# Altium PCB PCB1.PcbDoc
Units mil, origin at the board's own origin, x right, y up, seen from the top; angles counter-clockwise.
Board outline 2366.3 x 3345.45 mil, 2 copper layers (Top Layer, Bottom Layer); 28 components, 46 nets, 216 pads, 46 vias.
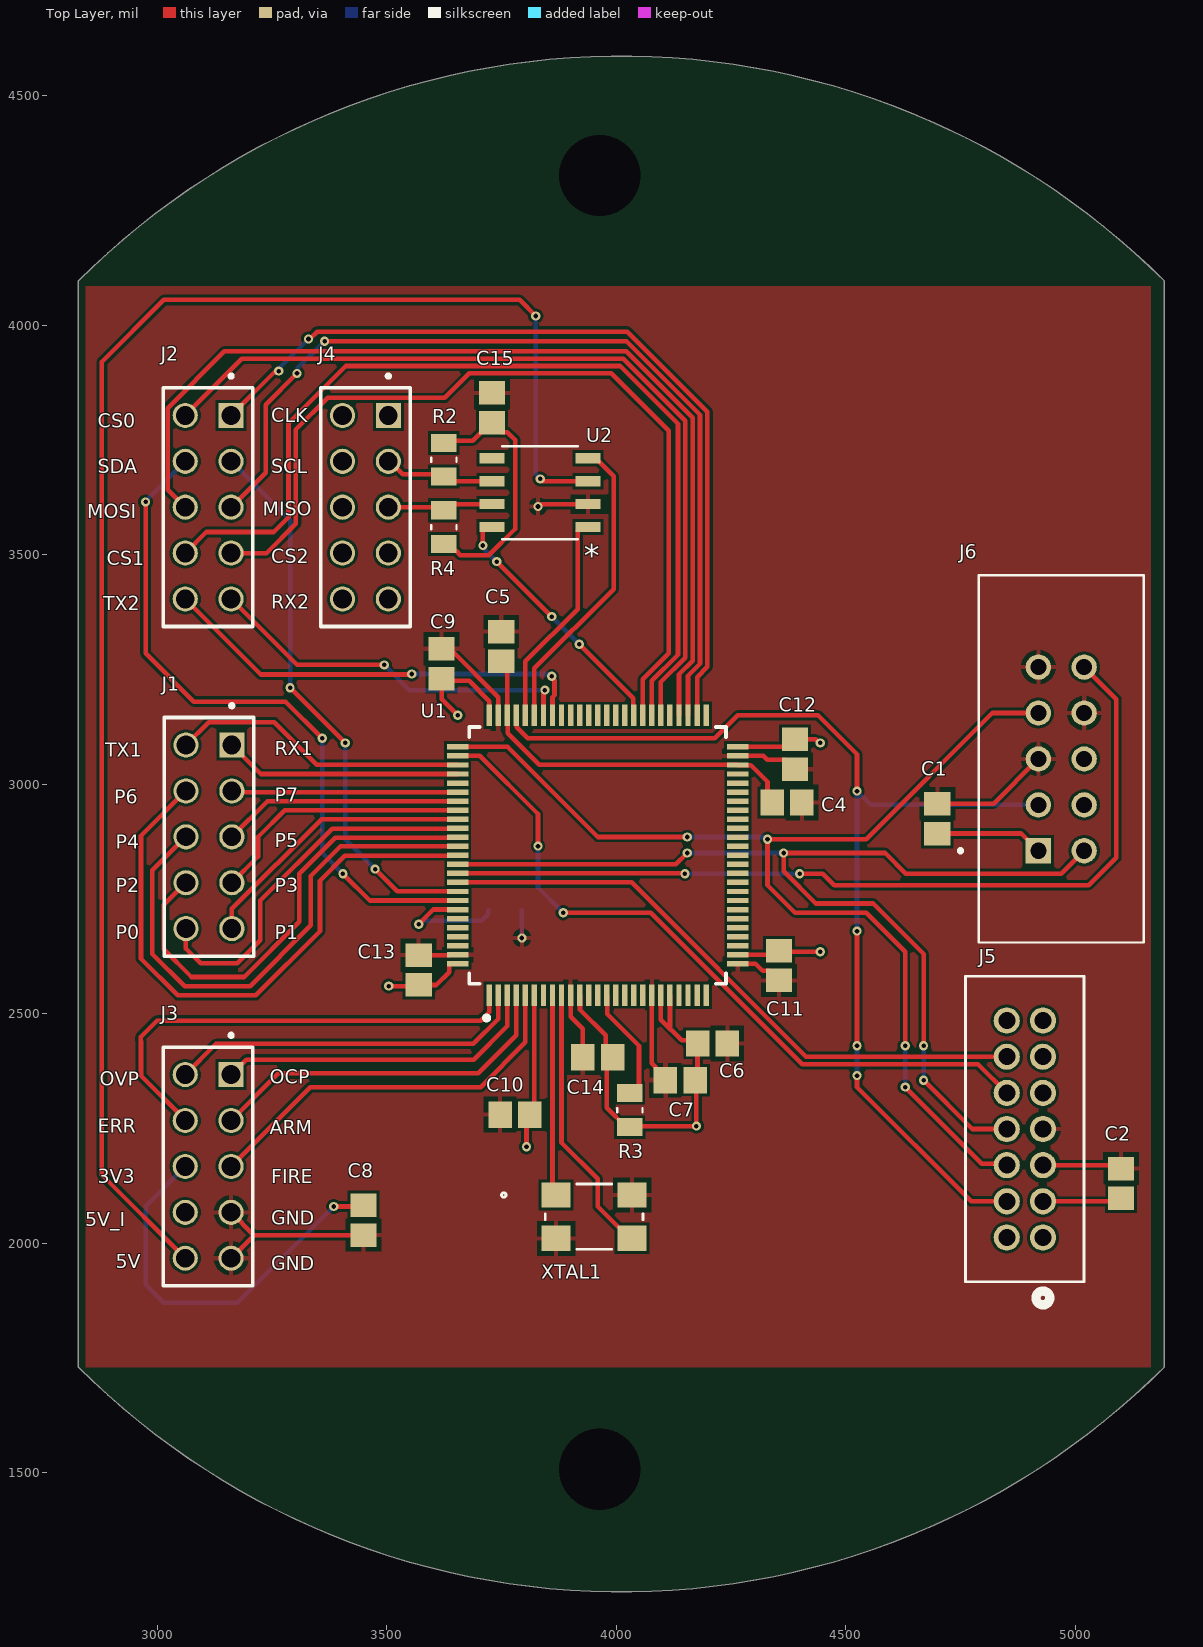
[diagram p0: Top Layer view]
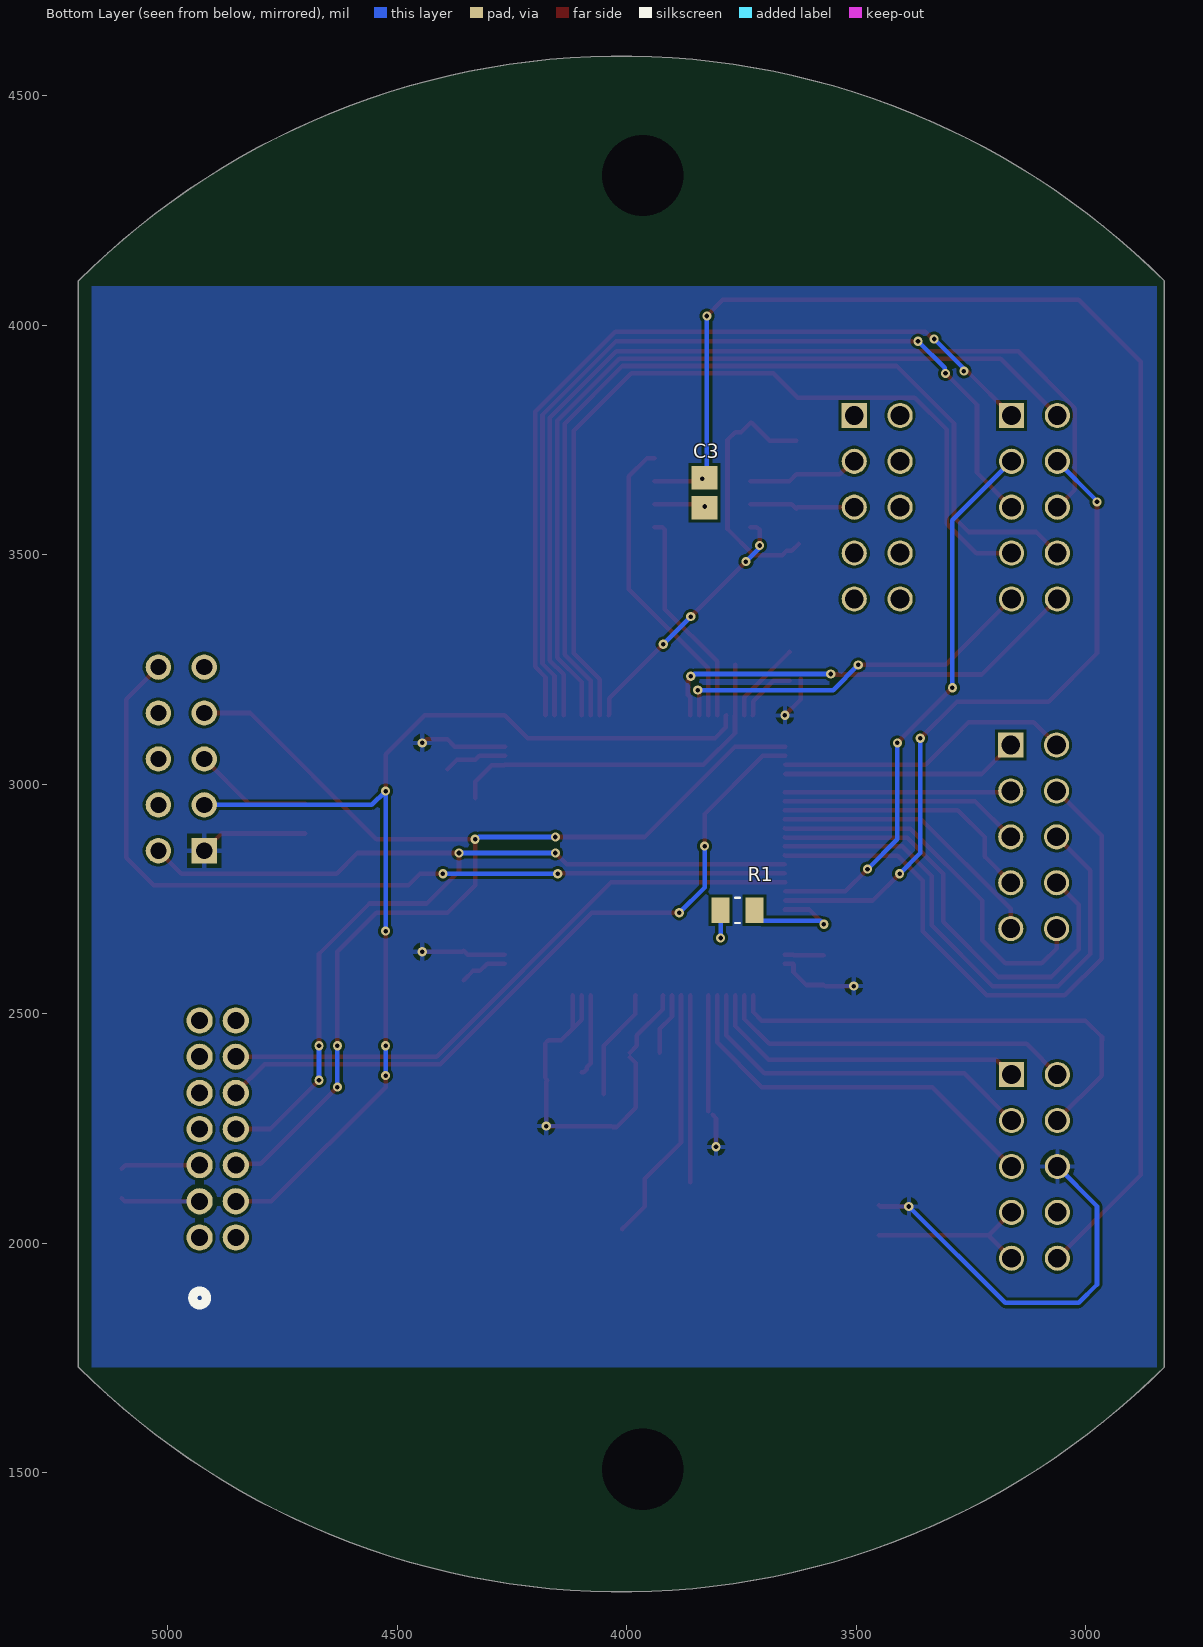
[diagram p1: Bottom Layer view, seen from below]

## Layer stack, top to bottom
Top Solder: solder mask 0.4, Solder Resist, Dk 3.5
Top Layer: signal copper 1.4
Dielectric 1: dielectric 12.6, FR-4, Dk 4.8
Bottom Layer: signal copper 1.4
Bottom Solder: solder mask 0.4, Solder Resist, Dk 3.5

## Board outline
2828.29,1730.47 ccw(c4011.44,2913.62) 5194.59,1730.47 5194.59,4096.06 ccw(c4011.44,2912.91) 2828.29,4096.06

## Design rules (kind name [scope] priority, off if disabled: settings)
Clearance [All] p1: gap=6 ignorepadtopadclearanceinfootprint=FALSE
HoleSize [All] p1: absolutevalues=TRUE maxlimit=200 minlimit=1 maxpercent=80.000 minpercent=20.000
MinimumSolderMaskSliver [All] p1: minsoldermaskwidth=5
PolygonConnect [All] p1: connectstyle=Relief reliefconductorwidth=10 reliefentries=4 polygonreliefangle="90 Angle" airgapwidth=10
RoutingVias [All] p1: holewidth=10 width=20 viastyle="Through Hole" minholewidth=10 minwidth=20 maxholewidth=200 maxwidth=200
SilkToSolderMaskClearance [IsPad] p1: minsilkscreentomaskgap=9 clearancetoexposedcopper=TRUE
SolderMaskExpansion [All] p1: expansion=4 istentingtop=FALSE
SupplyNets "Schematic Supply Nets_43" [InNet('GPIO4')] p1: voltage=0.000
SupplyNets "Schematic Supply Nets_42" [InNet('GPIO3')] p2: voltage=0.000
SupplyNets "Schematic Supply Nets_41" [InNet('GPIO6')] p3: voltage=0.000
SupplyNets "Schematic Supply Nets_40" [InNet('GPIO7')] p4: voltage=0.000
SupplyNets "Schematic Supply Nets_39" [InNet('GPIO5')] p5: voltage=0.000
SupplyNets "Schematic Supply Nets_38" [InNet('GPIO2')] p6: voltage=0.000
SupplyNets "Schematic Supply Nets_37" [InNet('GPIO0')] p7: voltage=0.000
SupplyNets "Schematic Supply Nets_36" [InNet('CS1')] p8: voltage=0.000
SupplyNets "Schematic Supply Nets_35" [InNet('CS2')] p9: voltage=0.000
SupplyNets "Schematic Supply Nets_34" [InNet('T_SEL')] p10: voltage=0.000
SupplyNets "Schematic Supply Nets_33" [InNet('GPIO1')] p11: voltage=0.000
SupplyNets "Schematic Supply Nets_32" [InNet('FIRE')] p12: voltage=0.000
SupplyNets "Schematic Supply Nets_31" [InNet('FDCAN1_RX')] p13: voltage=0.000
SupplyNets "Schematic Supply Nets_30" [InNet('RESET')] p14: voltage=0.000
SupplyNets "Schematic Supply Nets_29" [InNet('SWO')] p15: voltage=0.000
SupplyNets "Schematic Supply Nets_28" [InNet('SPI_MOSI')] p16: voltage=0.000
SupplyNets "Schematic Supply Nets_27" [InNet('3V3')] p17: voltage=0.000
SupplyNets "Schematic Supply Nets_26" [InNet('JTDI')] p18: voltage=0.000
SupplyNets "Schematic Supply Nets_25" [InNet('CANH')] p19: voltage=0.000
SupplyNets "Schematic Supply Nets_24" [InNet('SWDRESET')] p20: voltage=0.000
SupplyNets "Schematic Supply Nets_23" [InNet('OVP')] p21: voltage=0.000
SupplyNets "Schematic Supply Nets_22" [InNet('OCP')] p22: voltage=0.000
SupplyNets "Schematic Supply Nets_21" [InNet('OSC_IN')] p23: voltage=0.000
SupplyNets "Schematic Supply Nets_20" [InNet('ERR')] p24: voltage=0.000
SupplyNets "Schematic Supply Nets_19" [InNet('USART2_RX')] p25: voltage=0.000
SupplyNets "Schematic Supply Nets_18" [InNet('SPI_CLK')] p26: voltage=0.000
SupplyNets "Schematic Supply Nets_17" [InNet('USART1_RX')] p27: voltage=0.000
SupplyNets "Schematic Supply Nets_16" [InNet('CS0')] p28: voltage=0.000
SupplyNets "Schematic Supply Nets_15" [InNet('BOOT0')] p29: voltage=0.000
SupplyNets "Schematic Supply Nets_14" [InNet('ARM')] p30: voltage=0.000
SupplyNets "Schematic Supply Nets_13" [InNet('SPI_MISO')] p31: voltage=0.000
SupplyNets "Schematic Supply Nets_12" [InNet('GND')] p32: voltage=0.000
SupplyNets "Schematic Supply Nets_11" [InNet('USART2_TX')] p33: voltage=0.000
SupplyNets "Schematic Supply Nets_10" [InNet('FDCAN1_TX')] p34: voltage=0.000
SupplyNets "Schematic Supply Nets_9" [InNet('I2C_SCL')] p35: voltage=0.000
SupplyNets "Schematic Supply Nets_8" [InNet('SWDCLK')] p36: voltage=0.000
SupplyNets "Schematic Supply Nets_7" [InNet('5V_ISO')] p37: voltage=0.000
SupplyNets "Schematic Supply Nets_6" [InNet('USART1_TX')] p38: voltage=0.000
SupplyNets "Schematic Supply Nets_5" [InNet('I2C_SDA')] p39: voltage=0.000
SupplyNets "Schematic Supply Nets_4" [InNet('OSC_OUT')] p40: voltage=0.000
SupplyNets "Schematic Supply Nets_3" [InNet('SWDIO')] p41: voltage=0.000
SupplyNets "Schematic Supply Nets_2" [InNet('5V')] p42: voltage=0.000
SupplyNets "Schematic Supply Nets_1" [InNet('CANL')] p43: voltage=0.000
SupplyNets "Schematic Supply Nets" [InNet('JTRST')] p44: voltage=0.000
Width [All] p1: maxlimit=10 minlimit=7.87 preferedwidth=10
27 further rules are at their usual default settings.

## Components (designator, comment, footprint, x,y, rotation, side; value= is the part's Value field where it differs from the comment)
C1 "100n" CAPC2013X145X48NL20T23 4700,2925 r270 top
C2 "100n" CAPC2013X145X48NL20T23 5100,2130 r270 top
C3 "100n" CAPC2013X145X48NL20T23 3830,3635 r90 bottom
C4 "2.2u" CAPC2013X145X48NL20T23 4372.48,2960 r180 top
C5 "2.2u" CAPC2013X145X48NL20T23 3750,3300 r270 top
C6 "100n" CAPC2013X145X48NL20T23 4210,2435 r0 top
C7 "100n" CAPC2013X145X48NL20T23 4140,2355 r180 top
C8 "4.7u" CAPC2013X145X48NL20T23 3450,2050 r90 top
C9 "100n" CAPC2013X145X48NL20T23 3620,3262.52 r270 top
C10 "100n" CAPC2013X145X48NL20T23 3780,2280 r0 top
C11 "100n" CAPC2013X145X48NL20T23 4355,2605 r90 top
C12 "100n" CAPC2013X145X48NL20T23 4390,3065 r90 top
C13 "100n" CAPC2013X145X48NL20T23 3570,2595 r270 top
C14 "100n" CAPC2013X145X48NL20T23 3960,2405 r0 top
C15 "4.7n" CAPC2013X145X48NL20T23 3730,3820 r270 top
J1 "SSW-105-02-G-D" SAMTEC_SSW-105-02-G-D 3162.99,3085.35 r90 top locked
J2 "SSW-105-02-G-D" SAMTEC_SSW-105-02-G-D 3161.42,3803.46 r90 top locked
J3 "SSW-105-02-G-D" SAMTEC_SSW-105-02-G-D 3161.42,2367.24 r90 top locked
J4 "CAN" SAMTEC_SSW-105-02-G-D 3503.94,3803.46 r90 top locked
J5 "878311431" CONN14_878311431_MOL 4930,2012.52 r90 top
J6 "103308-1" TE_103308-1 4970,3055 r90 top
R1 "" RESC2012X65N 3758.19,2725 r0 bottom
R2 "" RESC2012X65N 3625,3706.81 r270 top
R3 "" RESC2012X65N 4030,2290 r270 top
R4 "" RESC2012X65N 3625,3560 r270 top
U1 "STM32H7B0VBT6" FP-LQFP100-MFG 3960,2845 r90 top locked
U2 "MCP2557FD-H/SN" SOIC8_SN_MCH 3834.5,3635 r180 top
XTAL1 "FY0800018" "4xtal- 1-3xtal 2-4NC_DIO" 3952.32,2057.76 r0 top

## Footprints (in the part's own frame and the unit in brackets; to place one, negate y for a bottom-side part, rotate by r counter-clockwise, add the part's x,y. Pads: shape width x height; smd on the part's side, far side on the other; paste and mask are expansions set on the pad)
"4xtal- 1-3xtal 2-4NC_DIO" [mil]
  rect 63x55 smd paste-27.5 mask+0: 1(-82.68,47.24) 2(82.68,47.24) 3(82.68,-47.24) 4(-82.68,-47.24)
  silkscreen extent -202,-71 106,71, body extent -101,-66 101,66, height 31
CAPC2013X145X48NL20T23 [mm] "Chip Capacitor, 2-Leads, Body 2.00x1.25mm, IPC Medium Density"
  rect 1.3x1.45 smd: 1(-0.825,0) 2(0.825,0)
  body extent -1.1,-0.72 1.1,0.72, height 1.45
CONN14_878311431_MOL [mil]
  round 57 hole 37 paste-99999 mask+0: 1(0,0) 2(0,78.74) 3(78.74,0) 4(78.74,78.74) 5(157.48,0) 6(157.48,78.74) 7(236.22,0) 8(236.22,78.74) 9(314.96,0) 10(314.96,78.74) 11(393.7,0) 12(393.7,78.74) 13(472.44,0) 14(472.44,78.74)
  silkscreen extent -147,-90 569,168
FP-LQFP100-MFG [mm]
  rect 1.2x0.3 smd paste+0 mask+0: 1(-7.75,6) 2(-7.75,5.5) 3(-7.75,5) 4(-7.75,4.5) 5(-7.75,4) 6(-7.75,3.5) 7(-7.75,3) 8(-7.75,2.5) 9(-7.75,2) 10(-7.75,1.5) 11(-7.75,1) 12(-7.75,0.5) 13(-7.75,0) 14(-7.75,-0.5) 15(-7.75,-1) 16(-7.75,-1.5) 17(-7.75,-2) 18(-7.75,-2.5) 19(-7.75,-3) 20(-7.75,-3.5) 21(-7.75,-4) 22(-7.75,-4.5) 23(-7.75,-5) 24(-7.75,-5.5) 25(-7.75,-6) 51(7.75,-6) 52(7.75,-5.5) 53(7.75,-5) 54(7.75,-4.5) 55(7.75,-4) 56(7.75,-3.5) 57(7.75,-3) 58(7.75,-2.5) 59(7.75,-2) 60(7.75,-1.5) 61(7.75,-1) 62(7.75,-0.5) 63(7.75,0) 64(7.75,0.5) 65(7.75,1) 66(7.75,1.5) 67(7.75,2) 68(7.75,2.5) 69(7.75,3) 70(7.75,3.5) 71(7.75,4) 72(7.75,4.5) 73(7.75,5) 74(7.75,5.5) 75(7.75,6)
  rect 0.3x1.2 smd paste+0 mask+0: 26(-6,-7.75) 27(-5.5,-7.75) 28(-5,-7.75) 29(-4.5,-7.75) 30(-4,-7.75) 31(-3.5,-7.75) 32(-3,-7.75) 33(-2.5,-7.75) 34(-2,-7.75) 35(-1.5,-7.75) 36(-1,-7.75) 37(-0.5,-7.75) 38(0,-7.75) 39(0.5,-7.75) 40(1,-7.75) 41(1.5,-7.75) 42(2,-7.75) 43(2.5,-7.75) 44(3,-7.75) 45(3.5,-7.75) 46(4,-7.75) 47(4.5,-7.75) 48(5,-7.75) 49(5.5,-7.75) 50(6,-7.75) 76(6,7.75) 77(5.5,7.75) 78(5,7.75) 79(4.5,7.75) 80(4,7.75) 81(3.5,7.75) 82(3,7.75) 83(2.5,7.75) 84(2,7.75) 85(1.5,7.75) 86(1,7.75) 87(0.5,7.75) 88(0,7.75) 89(-0.5,7.75) 90(-1,7.75) 91(-1.5,7.75) 92(-2,7.75) 93(-2.5,7.75) 94(-3,7.75) 95(-3.5,7.75) 96(-4,7.75) 97(-4.5,7.75) 98(-5,7.75) 99(-5.5,7.75) 100(-6,7.75)
  silkscreen extent -9.12,-7.1 7.1,7.1, body extent -8.45,-8.45 8.45,8.45, height 0.25
RESC2012X65N [mm]
  rect 1x1.42 smd: 1(-0.935,0) 2(0.935,0)
  silkscreen extent -0.12,-0.7 0.12,0.7
SAMTEC_SSW-105-02-G-D [mm]
  rect 1.39x1.39 hole 1.04: 01(0,0)
  round 1.39 hole 1.04: 02(0,2.54) 03(-2.54,0) 04(-2.54,2.54) 05(-5.08,0) 06(-5.08,2.54) 07(-7.62,0) 08(-7.62,2.54) 09(-10.16,0) 10(-10.16,2.54)
  silkscreen extent -11.69,-1.21 2.27,3.75
SOIC8_SN_MCH [mil]
  rect 55x22 smd paste+0 mask+0: 1(-104.5,75) 2(-104.5,25) 3(-104.5,-25) 4(-104.5,-75) 5(104.5,-75) 6(104.5,-25) 7(104.5,25) 8(104.5,75)
  silkscreen extent -82,-102 82,102, body extent -118,-96 118,96, height 69
TE_103308-1 [mil]
  rect 55x55 hole 35: 1(-200,50)
  round 55 hole 35: 2(-100,50) 3(0,50) 4(100,50) 5(200,50) 6(-200,-50) 7(-100,-50) 8(0,-50) 9(100,-50) 10(200,-50)
  silkscreen extent -400,-180 400,223

## Part data
C1 C2 C3 C4 C5 C6 C7 C8 C9 C10 C11 C12 C13 C14 C15: library part CMP-2007-03205-1, "100u", Manufacturer=Vitramon, Part Number=VJ0805Y682KXAMT
J1 J2 J3: Package=None, Availability=Unavailable, MF="Samtec Inc.", MP=SSW-105-02-G-D, Price=None
J4: library part SSW-105-02-G-D, Package=None, Availability=Unavailable, MF="Samtec Inc.", MP=SSW-105-02-G-D, Price=None
J5: "2.00mm Pitch, Milli-Grid PCB Header, Dual Row, Vertical, Through Hole, Shrouded, 14 Circuits, 0.38Âµm Gold (Au) Plating, with Center Polarization Slot, with Locking Window, without PCB Locator, with Open End Wall, Tube", Manufacturer_Name="Molex Connector Corporation", Copyright="Copyright (C) 2026 Ultra Librarian. All rights reserved.", Datasheet=https://www.molex.com/en-us/products/part-detail-pdf/878311431?display=pdf, Manufacturer_Part_Number=878311431, RefDes=RefDes, Type=Type
J6: "Header;  Pin;  Vertical;  Copper Alloy;  Thermoplastic;  10;  0.100 x 0.100 in.;  1 A", Package=None, Availability=Unavailable, MF="TE Connectivity", MP=103308-1, Price=None, SnapEDA_Link=https://www.snapeda.com/parts/103308-1/TE%20Connectivity%20AMP%20Connectors/view-part/519501/?ref=snap
R1 R2 R3 R4: library part RN73C2A1K0BTD, "RN 0805 1K0 0.1% 10PPM 5KRL", Package=None, Availability=Unavailable, MP=RN73C2A1K0BTD, Price=None
U1: library part CMP-12105-000109-1, "IC MCU 32BIT 128KB FLASH 100LQFP"
U2: library part MCP2557FD-HSN, "No Description Available", Manufacturer_Name=Microchip, Copyright="Copyright (C) 2026 Ultra Librarian. All rights reserved.", Manufacturer_Part_Number=MCP2557FD-H/SN, RefDes=RefDes, Type=Type
XTAL1: "Description", Manufacturer_Name="Diodes Inc", Copyright="Copyright (C) 2025 Ultra Librarian. All rights reserved.", Manufacturer_Part_Number=FY0800018, RefDes=RefDes, Type=Type

## Free pads (board coordinates)
  round 0 hole 177.17 unplated: 1(3964.57,1507.4) 1(3964.57,4326.3)

## Via types
v1: diameter 20, hole 10, Top Layer to Bottom Layer, 46 vias

## Nets (pads, with @x,y where several pads share a name; then routed paths per layer and width w, separated by ;. In a path a pad name is that pad's centre, name@x,y a point inside that pad or via, vN(x,y) a via of type N, cw(c..) or ccw(c..) an arc to the next point about the centre after c; other vN are vias at no path point)
3V3: C1.2 C2.2 C6.1 C7.1 C8.2 C9.2 C10.2 C11.2 C12.2 C13.2 C14.2 J3.06 J5.3 J6.1 R3.2 U1.6 U1.11 U1.20 U1.21 U1.27 U1.50 U1.75 U1.100 | length 3340.4
  Top Layer w10: v1(3385,2080) 3447.52,2080 C8.2 ; v1(3505,2560) 3567.48,2560 C13.2 3608.62,2562.52 3636.26,2590.16 3636.26,2607.87 3637.17,2608.78 U1.100 ; C9.2 3620,3185 v1(3655,3150) ; C9.2@3645,3225 3680,3225 3723.96,3181.04 3723.96,3150.96 U1.75@3724.68,3150.24 ; v1(3805,2210) 3805,2272.52 C10.2 ; U1.6@3821.89,2540 3822.2,2539.68 C10.2@3822.2,2287.2 ; U1.11 3921.54,2538.98 3921.54,2508.46 3977.31,2452.69 3977.31,2430.17 C14.2@3992.48,2415 ; C14.2 3980,2392.52 3980,2294.92 4021.73,2253.19 R3.2 4031.81,2255 v1(4175,2255) 4175,2352.48 C7.1 4177.52,2360.04 C6.1 C6.1@4170.31,2442.21 ; U1.20 4097.8,2487.2 4142.79,2442.21 ; U1.21 4117.48,2467.52 4142.79,2442.21 ; U1.50@4264.8,3081.34 4373.86,3081.34 C12.2 4434.81,3097.48 4442.29,3090 v1(4445,3090) ; U1.27 4345.98,2628.46 C11.2 4357.48,2635 v1(4445,2635) ; C1.2 4882.48,2892.52 J6.1 ; J5.3 5093.74,2091.26 C2.2 ; 4142.79,2442.21 C6.1@4170.31,2442.21 ; 4142.79,2442.21 C6.1@4170.31,2442.21
  Bottom Layer w10: J3.06 2975,2080.83 2975,1910 3015,1870 3175,1870 v1(3385,2080)
5V: C3.2 J3.10 U2.3 | length 3513.5
  Top Layer w10: J3.10 2880,2148.66 2880,3920 3015,4055 3790,4055 v1(3825,4020) ; v1@3830,3665 v1(3835,3665) 3840,3660 U2.3
  Bottom Layer w10: v1(3825,4020) 3825,3675 v1(3835,3665)
5V_ISO: J3.08
ARM: J3.03 U1.4 | length 785.3
  Top Layer w10: J3.03 3264.17,2370 3700,2370 3782.83,2452.83 U1.4
BOOT0: R1.1 U1.94 | length 266.8
  Top Layer w10: v1(3570,2695) 3602.01,2727.01 3654.76,2727.01 U1.94
  Bottom Layer w10: v1(3570,2695) 3577.05,2702.05 3706.69,2702.05 3721.38,2716.73 R1.1
CANH: J4.05 R4.1 U2.7 | length 231.6
  Top Layer w10: J4.05 3626.54,3603.46 3630,3600 3640,3610 U2.7
CANL: J4.03 R2.2 U2.6 | length 244.1
  Top Layer w10: J4.03 3506.92,3703.46 3515.38,3695 3535.38,3675 3630,3675 3645,3660 U2.6
CS0: J2.02 U1.56 | length 1860.4
  Top Layer w10: J2.02 3184.95,3927 4015.63,3927 4151,3791.63 4151,3275.75 4097.8,3222.54 U1.56
CS1: J2.08 U1.57 | length 2073.1
  Top Layer w10: J2.08 3107.31,3549.36 3254.36,3549.36 3286.49,3581.49 3286.49,3786.49 3411,3911 4009,3911 4135,3785 4135,3282.37 4078.11,3225.48 U1.57
CS2: J2.07 U1.58 | length 1930.9
  Top Layer w10: J2.07 3238.46,3503.46 3302.63,3567.63 3302.63,3772.63 3371.83,3841.83 3627.03,3841.83 3680.2,3895 3990,3895 4115,3770 4115,3285 4058.43,3228.43 U1.58
ERR: J3.04 U1.1 | length 1040.6
  Top Layer w10: J3.04 3061.42,2268.58 2965,2365 2965,2440 2964.14,2440.86 2964.14,2449.14 3000,2485 3705,2485 3723.78,2503.78 U1.1
FDCAN1_RX: U1.70 U2.4 | length 664.3
  Top Layer w10: U1.70 3822.2,3252.2 3995,3425 3995,3670.5 3955.5,3710 U2.4
FDCAN1_TX: U1.71 U2.1 | length 476.1
  Top Layer w10: U1.71 3802.52,3267.52 3916.5,3381.5 3916.5,3554 3922.5,3560 U2.1
FIRE: J3.05 U1.5 | length 855.4
  Top Layer w10: J3.05 3334.17,2340 3705,2340 3802.52,2437.52 U1.5
GND: C1.1 C2.1 C3.1 C4.1 C5.1 C6.2 C7.2 C8.1 C9.1 C10.1 C11.1 C12.1 C13.1 C14.1 C15.1 J3.07 J3.09 J5.5 J5.7 J6.3 J6.5 J6.9 R1.2 U1.10 U1.19 U1.26 U1.49 U1.74 U1.99 U2.2 XTAL1.2 XTAL1.4 | length 1805.4
  Top Layer w10: J3.09 3211.69,2017.52 ; J3.07 3211.14,2017.52 3211.69,2017.52 ; C8.1 3211.69,2017.52 ; C13.1 3636.18,2627.48 3637.17,2628.46 U1.99 ; C9.1@3645,3287.91 3743.46,3189.45 U1.74 ; v1(3830,3605) 3832.71,3605 3837.71,3610 U2.2 ; U1.10 3900.94,2493.64 3927.52,2467.07 C14.1@3927.52,2415 ; U1.19 4078.11,2391.89 4086.93,2383.07 4086.93,2378.54 4093.34,2372.13 C7.2@4097.87,2372.13 ; U1.49@4264.8,3061.65 4320.67,3061.65 4329.21,3053.11 4369.41,3053.11 C12.1 ; U1.26 4303.74,2608.78 4319.41,2593.11 4334.41,2593.11 C11.1 ; C1.1 4822.48,2957.48 J6.3 ; J5.5 5092.48,2170 C2.1
  Bottom Layer w10: v1(3795,2665) R1.2
GPIO0: J1.10 U1.85 | length 821.1
  Top Layer w10: J1.10 3062.99,2642.01 3095,2610 3175,2610 3225,2660 3225,2746.65 3381.5,2903.15 3653.98,2903.15 U1.85
GPIO1: J1.09 U1.84 | length 615.8
  Top Layer w10: J1.09 3162.99,2728.28 3358.45,2923.74 U1.84
GPIO2: J1.08 U1.86 | length 1017.5
  Top Layer w10: J1.08 3015,2737.36 3015,2640 3075,2580 3190,2580 3310,2700 3310,2805 3388.46,2883.46 3653.98,2883.46 U1.86
GPIO3: J1.07 U1.83 | length 582.3
  Top Layer w10: J1.07 3220,2842.36 3220,2885 3278.43,2943.43 U1.83
GPIO4: J1.06 U1.87 | length 1168.8
  Top Layer w10: J1.06 2990,2812.36 2990,2630 3060,2560 3202.69,2560 3335,2692.31 3335,2800 3399.68,2864.68 U1.87
GPIO5: J1.05 U1.82 | length 524.1
  Top Layer w10: J1.05 3240.75,2963.11 U1.82
GPIO6: J1.04 U1.88 | length 1319.7
  Top Layer w10: J1.04 2965,2887.36 2965,2620 3045,2540 3215,2540 3355,2680 3355,2790 3409.09,2844.09 3653.98,2844.09 U1.88
GPIO7: J1.03 U1.81 | length 492.9
  Top Layer w10: J1.03 3165.55,2982.8 U1.81
I2C_SCL: J2.03 U1.92 | length 1218.1
  Top Layer w10: v1(3290,3210) v1(3410,3090) ; v1(3475,2815) 3523.62,2766.38 U1.92@3654.57,2766.38
  Bottom Layer w10: J2.03 3290,3574.88 v1(3290,3210) ; v1(3410,3090) 3410,2880 v1(3475,2815)
I2C_SDA: J2.04 U1.93 | length 1503.2
  Top Layer w10: v1(2975,3615) 2975,3285 3080,3180 3280,3180 v1(3360,3100) ; v1(3405,2805) 3463.31,2746.69 U1.93@3654.57,2746.69
  Bottom Layer w10: v1(2975,3615) 2975,3617.05 J2.04 ; v1(3360,3100) 3360,2850 v1(3405,2805)
JTDI: J5.10 U1.77 | length 1594.5
  Top Layer w10: U1.77@3654.57,3061.65 3703.35,3061.65 3830,2935 v1(3830,2865) ; v1(3885,2720) 4075.99,2720 4405.77,2390.22 4788.52,2390.22 J5.10
  Bottom Layer w10: v1(3830,2865) 3830,2775 v1(3885,2720)
JTRST: J5.12 U1.91 | length 1354
  Top Layer w10: U1.91@3654.57,2786.06 4033.94,2786.06 4413.78,2406.22 J5.12
NetC4_2: C4.2 C5.2 U1.48 U1.73 | length 794.4
  Top Layer w10: C5.2@3762.83,3260 3762.83,3150.24 3763.74,3149.33 3763.74,3111.26 3833.03,3041.97 4264.8,3041.97 4265.71,3041.06 4293.94,3041.06 4330,3005 C4.2@4330,2970
NetC15_2: C15.2 R2.1 R4.2 | length 564.3
  Top Layer w10: R4.2 3639.69,3508.5 3651.5,3508.5 3661,3499 3723.06,3499 3780,3555.94 3780,3750 3763.07,3766.93 3750.59,3766.93 C15.2 3727.05,3787.52 3688.15,3748.62 R2.1@3630,3748.62
OCP: J3.01 U1.3 | length 712.3
  Top Layer w10: J3.01 3194.17,2400 3690,2400 3763.15,2473.15 U1.3
OSC_IN: U1.8 XTAL1.1 | length 407.1
  Top Layer w10: U1.8@3861.26,2540 3861.57,2539.68 3861.57,2132.99
OSC_OUT: U1.9 XTAL1.3 | length 564
  Top Layer w10: U1.9@3880.94,2540 3881.26,2539.68 3881.26,2218.74 3960,2140 3960,2080 4006.99,2033.01 4008.5,2033.01 4009.75,2031.76 XTAL1.3@4009.75,2030.25
OVP: J3.02 U1.2 | length 783.7
  Top Layer w10: J3.02 3128.5,2434.33 3689.33,2434.33 3743.46,2488.46 U1.2
RESET: R3.1 U1.14 | length 244
  Top Layer w10: U1.14 3980.59,2538.98 3980.59,2499.41 4050,2430 R3.1@4050,2325
SPI_CLK: J2.01 U1.52 | length 1859.1
  Top Layer w10: J2.01 3256.04,3898.09 3263.09,3898.09 v1(3265,3900) ; v1(3330,3970) 3332.71,3970 3348.71,3986 4024.51,3986 4199,3811.51 4199,3255.86 4176.54,3233.4 U1.52
  Bottom Layer w10: v1(3265,3900) 3266.91,3901.91 3266.91,3906.91 v1(3330,3970)
SPI_MISO: J2.05 U1.53 | length 1995.8
  Top Layer w10: J2.05 3236.53,3678.58 3236.53,3826.53 v1(3305,3895) ; v1(3365,3965) 4022.88,3965 4183,3804.88 4183,3262.49 4156.85,3236.34 U1.53
  Bottom Layer w10: v1(3305,3895) 3306.91,3896.91 3306.91,3906.91 v1(3365,3965)
SPI_MOSI: J2.06 U1.54 | length 2147.4
  Top Layer w10: J2.06 3023.05,3641.83 3023.05,3819.35 3146.7,3943 4022.25,3943 4167,3798.25 4167,3269.12 4137.17,3239.28 U1.54
SWDCLK: J5.6 J6.4 U1.76 | length 2509.5
  Top Layer w10: U1.76@3654.57,3081.34 3763.66,3081.34 3960,2885 v1(4155,2885) ; v1(4630,2340) 4796.94,2173.06 4848.2,2173.06 J5.6 ; v1(4630,2430) 4630,2635 4545,2720 4390,2720 4330,2780 v1(4330,2880) 4545,2880 4820,3155 J6.4
  Bottom Layer w10: v1(4155,2885) 4322.29,2885 4327.29,2880 v1(4330,2880) ; v1(4630,2340) v1(4630,2430)
SWDIO: J5.4 J6.2 U1.72 | length 2394.9
  Top Layer w10: U1.72@3782.52,3150.24 3783.43,3149.33 3783.43,3123.93 3807.36,3100 4215,3100 4265,3150 4440,3150 4525,3065 v1(4525,2985) ; v1(4525,2365) 4525,2340 4773.74,2091.26 J5.4 ; v1(4525,2430) v1(4525,2680)
  Bottom Layer w10: v1(4525,2365) v1(4525,2430) ; v1@4525,2680.86 4525,2941.25 4525,2945.21 v1(4525,2985) 4555,2955 J6.2
SWDRESET: J6.10 U1.90 | length 1913.7
  Top Layer w10: U1.90 v1@4149.37,2805.63 ; v1(4400,2805) 4450,2805 4475,2780 5030,2780 5090,2840 5090,3185 J6.10
  Bottom Layer w10: v1(4150,2805) v1(4400,2805)
SWO: J5.8 J6.6 U1.89 | length 2334.6
  Top Layer w10: U1.89 3654.98,2825.22 4130.22,2825.22 v1(4155,2850) ; v1(4670,2355) 4776.26,2248.74 J5.8 ; v1(4670,2430) 4670,2630 4560,2740 4435,2740 4365,2810 v1(4365,2850) 4586.35,2850 4631.35,2805 4970,2805 J6.6
  Bottom Layer w10: v1(4155,2850) v1(4365,2850) ; v1(4670,2355) v1(4670,2430)
T_SEL: U1.59 U2.8 | length 562.5
  Top Layer w10: v1(3710,3520) 3710,3554 3716,3560 U2.8 ; v1(3740,3485) v1(3860,3365) ; v1(3920,3305) 4037.83,3187.17 4037.83,3151.02 U1.59
  Bottom Layer w10: v1(3710,3520) 3711.91,3518.09 3711.91,3513.09 v1(3740,3485) ; v1(3860,3365) v1(3920,3305)
USART1_RX: J1.01 U1.79 | length 517.7
  Top Layer w10: J1.01 3226.06,3022.28 U1.79@3654.57,3022.28
USART1_TX: J1.02 U1.78 | length 650.7
  Top Layer w10: J1.02 3112.64,3135 3255,3135 3348.03,3041.97 U1.78@3654.57,3041.97
USART2_RX: J2.09 U1.69 | length 822
  Top Layer w10: J2.09 3304.88,3260 v1(3495,3260) ; U1.69 3841.89,3199.18 3845,3202.29 v1(3845,3205)
  Bottom Layer w10: v1(3495,3260) 3550,3205 v1(3845,3205)
USART2_TX: J2.10 U1.68 | length 958.4
  Top Layer w10: J2.10 3225.88,3239 3554,3239 v1(3555,3240) ; v1(3860,3235) 3860,3232.29 3866,3226.29 3866,3193.43 3861.57,3189.01 U1.68
  Bottom Layer w10: v1(3555,3240) 3852.29,3240 3857.29,3235 v1(3860,3235)
pads on no net: J4.01 J4.02 J4.04 J4.06 J4.07 J4.08 J4.09 J4.10 J5.1 J5.2 J5.9 J5.11 J5.13 J5.14 J6.7 J6.8 U1.7 U1.12 U1.13 U1.15 U1.16 U1.17 U1.18 U1.22 U1.23 U1.24 U1.25 U1.28 U1.29 U1.30 U1.31 U1.32 U1.33 U1.34 U1.35 U1.36 U1.37 U1.38 U1.39 U1.40 U1.41 U1.42 U1.43 U1.44 U1.45 U1.46 U1.47 U1.51 U1.55 U1.60 U1.61 U1.62 U1.63 U1.64 U1.65 U1.66 U1.67 U1.80 U1.95 U1.96 U1.97 U1.98 U2.5

## Polygon pours and split planes (outlines as drawn)
GND on Top Layer "GND_L01_P000" (solid, pour order 0): 2845,4085 5165,4085 5165,1730 2845,1730
3V3 on Bottom Layer "3V3_L02_P001" (solid, pour order 1): 2845,4085 5165,4085 5165,1730 2845,1730

## Silkscreen, mask and mechanical layers (free items; w line width, h text height)
Top Overlay:
  text "CLK" at 3249.09,3787.99 h30
  text "CS0" at 2871.14,3776.18 h30
  text "SDA" at 2871.14,3677.76 h30
  text "SCL" at 3249.09,3677.76 h30
  text "MISO" at 3230,3585 h30
  text "MOSI" at 2847.52,3579.33 h30
  text "CS2" at 3249.09,3480.91 h30
  text "CS1" at 2890.83,3476.97 h30
  text "RX2" at 3249.09,3382.48 h30
  text "TX2" at 2882.95,3378.54 h30
  text "RX1" at 3256.97,3063.58 h30
  text "TX1" at 2886.89,3059.65 h30
  text "P7" at 3256.97,2961.22 h30
  text "P6" at 2906.57,2957.28 h30
  text "P5" at 3256.97,2862.8 h30
  text "P4" at 2910.51,2858.86 h30
  text "P2" at 2910.51,2764.37 h30
  text "P3" at 3256.97,2764.37 h30
  text "P0" at 2910.51,2662.01 h30
  text "P1" at 3256.97,2662.01 h30
  text "OCP" at 3245.16,2347.05 h30
  text "OVP" at 2875.08,2343.11 h30
  text "ERR" at 2871.14,2240.75 h30
  text "ARM" at 3245.16,2236.81 h30
  text "3V3" at 2871.14,2130.51 h30
  text "FIRE" at 3249.09,2130.51 h30
  text "GND" at 3249.09,2039.96 h30
  text "5V_I" at 2843.58,2037.09 h30
  text "5V" at 2910.51,1945.47 h30
  text "GND" at 3249.09,1941.54 h30
Mechanical 1:
  the board outline again, w10

## Text inside footprints (layer, text, board x,y; h text height)
U2: Top Overlay "*" at 3965,3545 h50 r180; Mechanical 13 "*" at 3965,3545 h50 r180